# Altium PCB CapsuleBase.PcbDoc
Units mil, origin at the board's own origin, x right, y up, seen from the top; angles counter-clockwise.
Board outline 3937.01 x 3937.01 mil, 2 copper layers (Top, Bottom), stack 65.748 mil thick; 2 components, 0 nets, 4 pads, 0 vias.
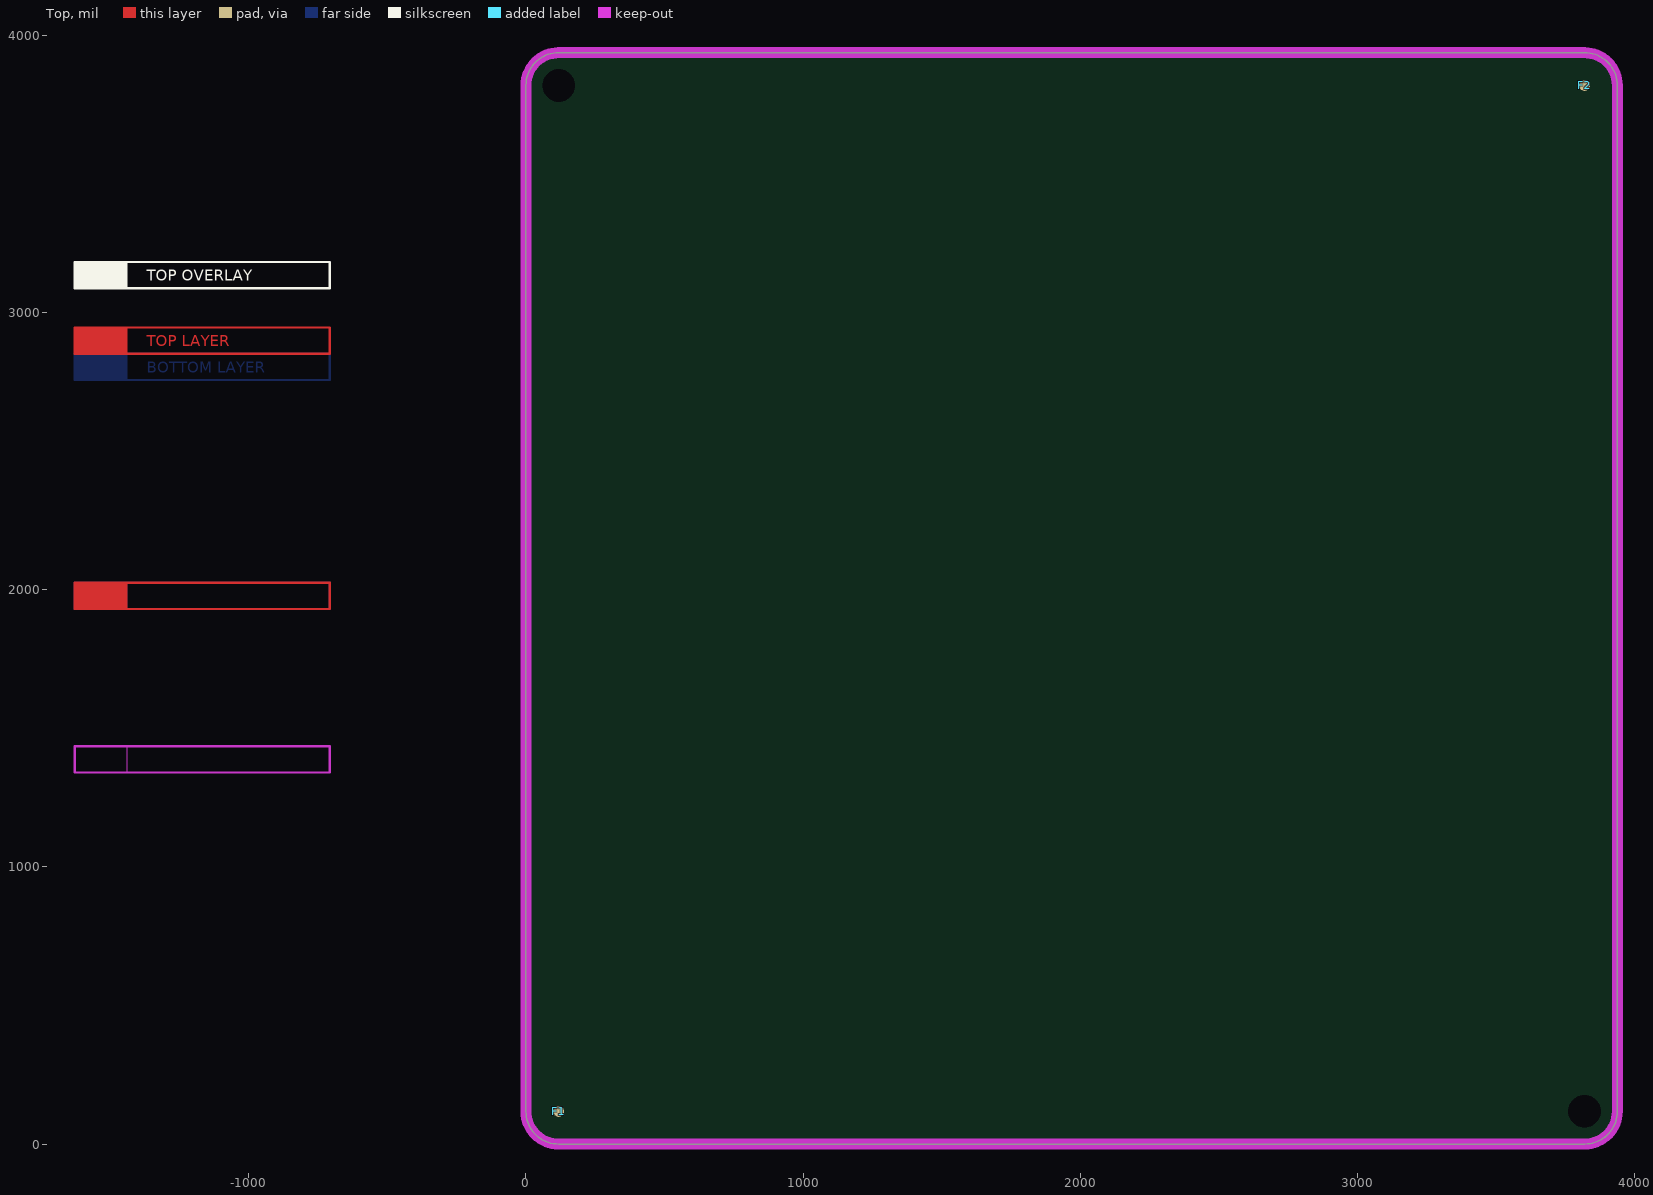
[diagram p0: Top view]
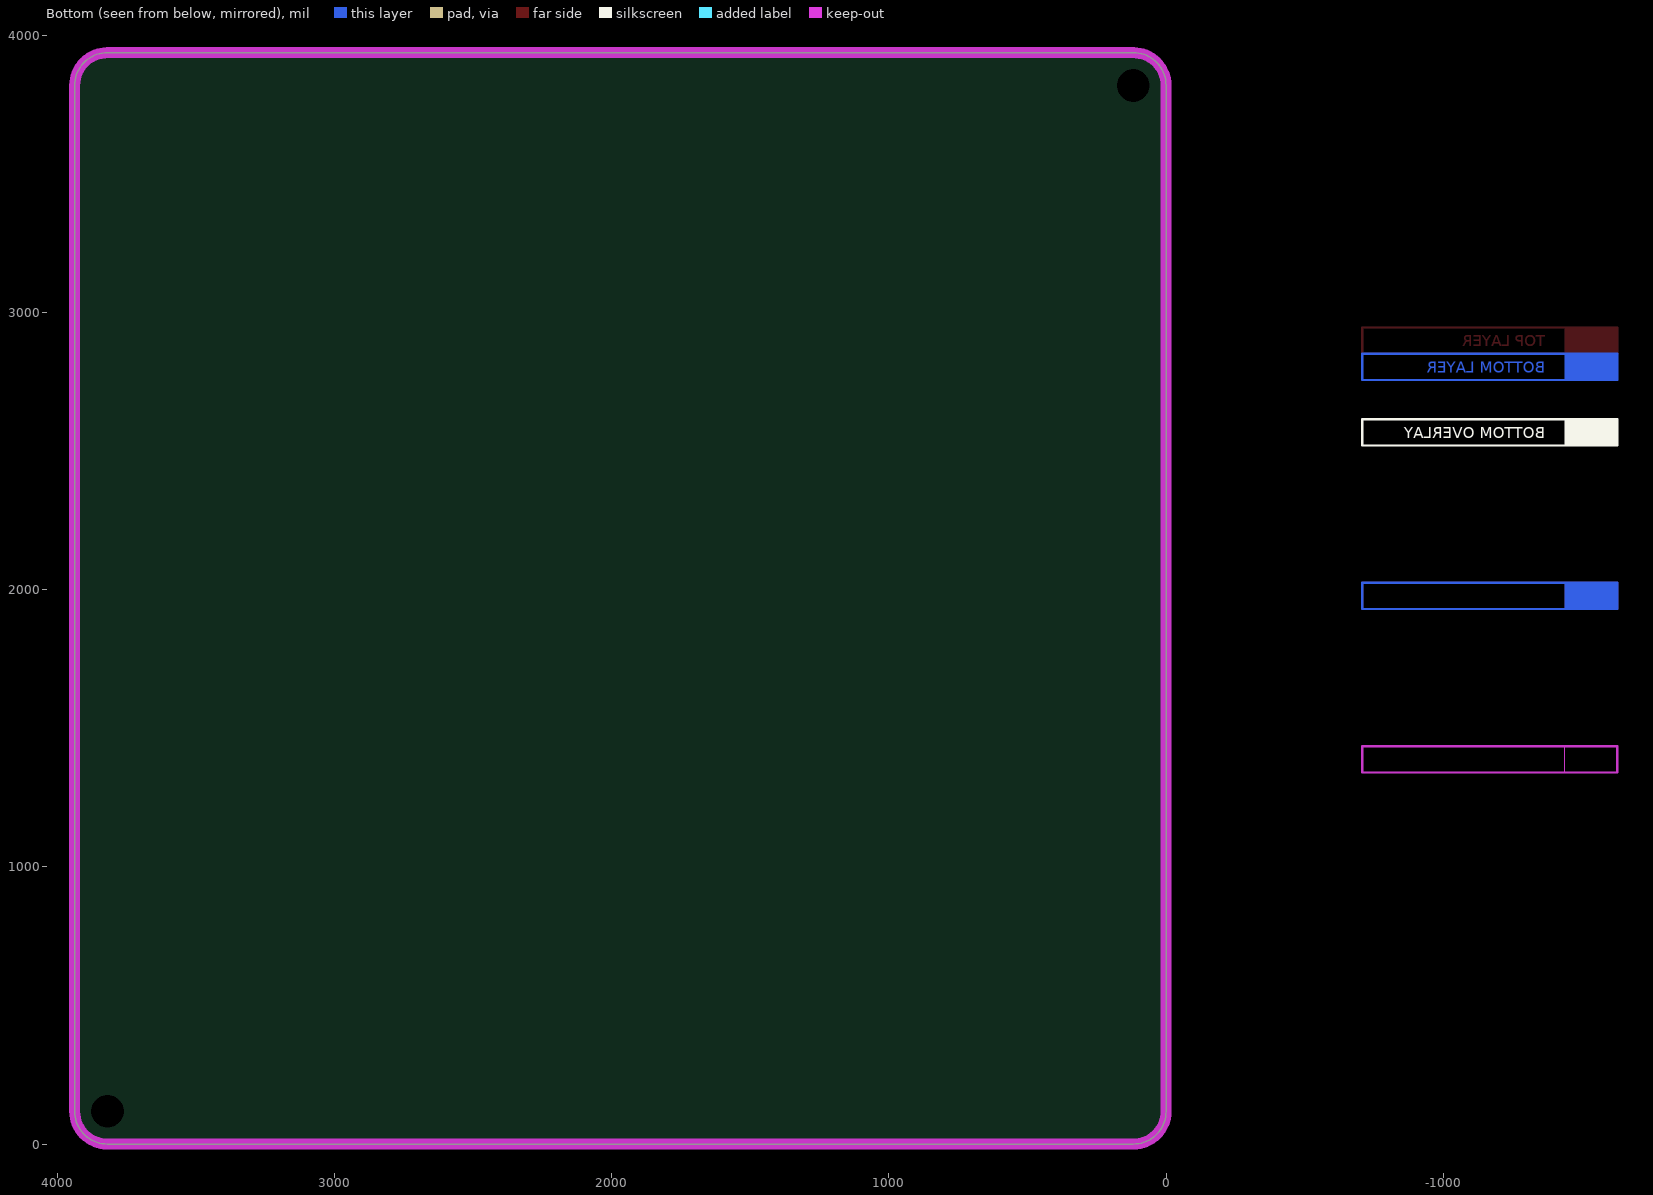
[diagram p1: Bottom view, seen from below]

## Layer stack, top to bottom
Top Solder: solder mask 0.4, Solder Resist, Dk 3.5
Top: signal copper 1.378
Dielectric1: core 62.9921, FR-4, Dk 4.58
Bottom: signal copper 1.378
Bottom Solder: solder mask 0.4, Solder Resist, Dk 3.5

## Board outline
0,118.11 0,3818.9 cw(c118.11,3818.9) 118.11,3937.01 3818.9,3937.01 cw(c3818.9,3818.9) 3937.01,3818.9 3937.01,118.11 cw(c3818.9,118.11) 3818.9,0 118.11,0 cw(c118.11,118.11)

## Design rules (kind name [scope] priority, off if disabled: settings)
AssemblyTestPointUsage [All] p1 off:
AssemblyTestpoint [All] p1 off: testpointundercomponent=TRUE minsize=40 maxsize=100 preferedsize=60 minholesize=0 maxholesize=40 preferedholesize=32 testpointgrid=1 usegrid=TRUE gridtolerance=0.01 allowsidetop=TRUE allowsidebottom=TRUE
Clearance ClearanceViaPad [IsVia vs IsPad] p1: gap=3.94
Clearance ClearanceGNDpolygons [InPolygonClass('GNDpolygons')] p2: gap=11.81
Clearance ClearanceTechnology [All] p3: gap=7.87
FabricationTestPointUsage [All] p1 off: valid=0 allowmultiple=FALSE
FabricationTestpoint [All] p1 off: side=3 testpointundercomponent=TRUE minsize=40 maxsize=100 preferedsize=60 minholesize=0 maxholesize=40 preferedholesize=32 testpointgrid=1 allowsidetop=TRUE allowsidebottom=TRUE usegrid=TRUE gridtolerance=0.01
HoleSize [All] p1: absolutevalues=TRUE maxlimit=248.03 minlimit=11.81 maxpercent=80.000 minpercent=20.000
HoleToHoleClearance [All] p1: gap=11.81 allowstackedmicrovias=TRUE
MinimumAnnularRing [All] p1: minimumring=7.87
MinimumSolderMaskSliver [All] p1: minsoldermaskwidth=3.94
PlaneClearance [All] p1: clearance=9.84
PolygonConnect PolygonConnectVia [IsVia] p1: connectstyle=Direct reliefconductorwidth=15.75 reliefentries=4 polygonreliefangle="90 Angle" airgapwidth=10
PolygonConnect PolygonConnectBigPads [(ObjectKind = 'Pad') And ((AsMM(PadXSize_AllLayers) > 2) Or (AsMM(PadYSize_AllLayers) > 2))] p2: connectstyle=Direct reliefconductorwidth=15.75 reliefentries=4 polygonreliefangle="90 Angle" airgapwidth=10
PolygonConnect PolygonConnectGeneral [All] p3: connectstyle=Relief reliefconductorwidth=11.81 reliefentries=4 polygonreliefangle="90 Angle" airgapwidth=7.87
RoutingVias [All] p1: holewidth=23.62 width=47.24 viastyle="Through Hole" minholewidth=11.81 minwidth=27.56 maxholewidth=35.43 maxwidth=55.12
SilkToSilkClearance [All] p1: silktosilkclearance=5.91
SilkToSolderMaskClearance SilkscreenOverComponentPads [IsPad] p1: minsilkscreentomaskgap=3.94 clearancetoexposedcopper=FALSE
SolderMaskExpansion [All] p1: expansion=3.94
Width WidthTechnology [All] p1: maxlimit=118.11 minlimit=6.3 preferedwidth=23.62
20 further rules are at their usual default settings.

## Classes and differential pairs
channel class "Column driver": "U_Column driver 1" "U_Column driver 2" "U_Column driver 3" "U_Column driver 4"
channel class "Row driver": "U_Row driver 1" "U_Row driver 2" "U_Row driver 3" "U_Row driver 4" "U_Row driver 5" "U_Row driver 6" "U_Row driver 7" "U_Row driver 8"

## Components (designator, comment, footprint, x,y, rotation, side; value= is the part's Value field where it differs from the comment)
F1 "Fiducial" FIDUCIAL 118.11,118.11 r90 top locked
F2 "Fiducial" FIDUCIAL 3818.9,3818.9 r90 top locked

## Footprints (in the part's own frame and the unit in brackets; to place one, negate y for a bottom-side part, rotate by r counter-clockwise, add the part's x,y. Pads: shape width x height; smd on the part's side, far side on the other; paste and mask are expansions set on the pad)
FIDUCIAL [mm] "Fiducial"
  round 1 smd paste-1 mask+0.5: ""(0,0)
  body extent -0.49,-0.5 0.5,0.5, height 0.5

## Free pads (board coordinates)
  round 39.37 hole 118.11: 0(118.11,3818.9) 0(3818.9,118.11)

## Nets (pads, with @x,y where several pads share a name; then routed paths per layer and width w, separated by ;. In a path a pad name is that pad's centre, name@x,y a point inside that pad or via, vN(x,y) a via of type N, cw(c..) or ccw(c..) an arc to the next point about the centre after c; other vN are vias at no path point)
pads on no net: F1. F2.
copper on no net: | length 4060
  Top w7.87: -1627.66,2850.95 -1627.66,2945.95 -707.66,2945.95 -707.66,2850.95 -1627.66,2850.95
  Bottom w7.87: -1627.66,2755.95 -1627.66,2850.95 -707.66,2850.95 -707.66,2755.95 -1627.66,2755.95

## Keep-outs
Keep-Out Layer:
  rectangle: -1627.66,1339.95 -1437.66,1434.95
  lines w7.87: -1627.66,1339.95 -1627.66,1434.95 -707.66,1434.95 -707.66,1339.95 -1627.66,1339.95
  lines w39.37: 118.11,3937.01 ccw(c118.11,3818.9) 0,3818.9 0,118.11 ccw(c118.11,118.11) 118.11,0 3818.9,0 ccw(c3818.9,118.11) 3937.01,118.11 ; 118.11,3937.01 118.11,3937.01 ; 118.11,3937.01 3818.9,3937.01 ; 3818.9,3937.01 cw(c3818.9,3818.9) 3937.01,3818.9 ; 3818.9,3937.01 3818.9,3937.01 ; 3937.01,118.11 3937.01,3818.9 ; 3937.01,118.11 3937.01,118.11 ; 3937.01,3818.9 3937.01,3818.9
  text "ROUTING KEEPOUT LAYER" at -1367.66,1366.95 h35

## Other copper
Top:
  rectangle: -1627.66,2850.95 -1437.66,2945.95
  text "TOP LAYER" at -1367.66,2877.95 h40
Bottom:
  rectangle: -1627.66,2755.95 -1437.66,2850.95
  text "BOTTOM LAYER" at -1367.66,2782.95 h40
Multi-Layer:
  rectangle: -1627.66,1929.95 -1437.66,2024.95
  lines w7.87: -1627.66,1929.95 -1627.66,2024.95 -707.66,2024.95 -707.66,1929.95 -1627.66,1929.95
  text "MULTILAYER" at -1367.66,1956.95 h40

## Silkscreen, mask and mechanical layers (free items; w line width, h text height)
Top Overlay:
  rectangle: -1627.66,3086.95 -1437.66,3181.95
  lines w7.87: -1627.66,3086.95 -707.66,3086.95 -707.66,3181.95 -1627.66,3181.95 -1627.66,3086.95
  text "TOP OVERLAY" at -1367.66,3113.95 h40
Bottom Overlay:
  rectangle: -1627.66,2519.95 -1437.66,2614.95
  lines w7.87: -1627.66,2519.95 -707.66,2519.95 -707.66,2614.95 -1627.66,2614.95 -1627.66,2519.95
  text "BOTTOM OVERLAY" at -1367.66,2546.95 h40
Top Paste:
  rectangle: -1627.66,3204.95 -1437.66,3299.95
  lines w7.87: -1627.66,3204.95 -1627.66,3299.95 -707.66,3299.95 -707.66,3204.95 -1627.66,3204.95
  text "TOP PASTE" at -1367.66,3231.95 h40
Bottom Paste:
  rectangle: -1627.66,2401.95 -1437.66,2496.95
  lines w7.87: -1627.66,2401.95 -1627.66,2496.95 -707.66,2496.95 -707.66,2401.95 -1627.66,2401.95
  text "BOTTOM PASTE" at -1367.66,2428.95 h40
Top Solder:
  rectangle: -1627.66,2968.95 -1437.66,3063.95
  lines w7.87: -1627.66,2968.95 -707.66,2968.95 -707.66,3063.95 -1627.66,3063.95 -1627.66,2968.95
  text "TOP SOLDER MASK" at -1367.66,2995.95 h40
Bottom Solder:
  rectangle: -1627.66,2637.95 -1437.66,2732.95
  lines w7.87: -1627.66,2637.95 -1627.66,2732.95 -707.66,2732.95 -707.66,2637.95 -1627.66,2637.95
  text "BOTTOM SOLDER MASK" at -1367.66,2664.95 h40
Drill Guide:
  rectangle: -1627.66,2283.95 -1437.66,2378.95
  lines w7.87: -1627.66,2283.95 -707.66,2283.95 -707.66,2378.95 -1627.66,2378.95 -1627.66,2283.95
  text "DRILL GUIDE (SLOTS)" at -1367.66,2310.95 h40
Outline:
  rectangle: -1627.66,2047.95 -1437.66,2142.95
  lines w3.94: 0,118.11 ccw(c118.11,118.11) 118.11,0 3818.9,0 ccw(c3818.9,118.11) 3937.01,118.11 3937.01,3818.9 ccw(c3818.9,3818.9) 3818.9,3937.01 118.11,3937.01 ccw(c118.11,3818.9) 0,3818.9 0,118.11
  lines w7.87: -1627.66,2047.95 -707.66,2047.95 -707.66,2142.95 -1627.66,2142.95 -1627.66,2047.95
  lines w9.84: 4717.48,-1105.32 9786.46,-1105.32 ; 4717.48,-934.06 9786.46,-934.06 ; 4657.48,-1889.76 ccw(c4712.6,-1889.76) 4712.6,-1944.88 9791.34,-1944.88 ccw(c9791.34,-1889.76) 9846.46,-1889.76 9846.46,-748.03 ccw(c9791.34,-748.03) 9791.34,-692.91 4712.6,-692.91 ccw(c4712.6,-748.03) 4657.48,-748.03 4657.48,-1889.76
  lines w10: -1727.66,4633.94 2716.54,4633.94 2716.54,4409.45 ; -1727.66,4835.71 2716.54,4835.71 2716.54,4611.66 ; -1537.66,3389.95 -767.66,3389.95 ; 1299.21,4409.45 1299.21,4633.94 ; 2716.54,4835.63 3739.17,4835.63 ; -1727.66,1252.95 -1727.66,3609.95 -597.66,3609.95 -597.66,1252.95 -1727.66,1252.95 ; -1727.66,4409.45 3740.16,4409.45 3740.16,5120.08 -1727.66,5120.08 -1727.66,4409.45
  text ".GlobalProjectName" at -1264.76,4920.28 h118.11
  text "Project:" at -1669.55,4914.02 h47.24
  text ".GlobalProjectTeam" at -1364.17,4696.85 h80
  text ".GlobalProjectLink" at 1383.86,4696.85 h80
  text "Team:" at -1669.55,4693.9 h47.24
  text "More info:" at 998.03,4693.9 h47.24
  text ".GlobalProjectRevision" at 2952.76,4488.19 h275.59
  text ".Pcb_File_Name_No_Path" at -1102.36,4485.59 h80
  text "PCB file name:" at -1669.55,4484.53 h47.24
  text ".GlobalRevisionDate" at 1894.43,4468.77 h80
  text "Rev:" at 2795.28,4468.77 h47.24
  text "Revision date:" at 1375.73,4464.85 h47.24
  text "LAYER USAGE" at -1537.66,3417.95 h80
  text "Fusion service size limits" at 5157.48,3023.62 h196.85
  text "5cm X 5cm" at 5275.59,2826.85 h196.85
  text "5cm X 10cm" at 5275.59,2678.11 h196.85
  text "5cm X 15cm" at 5275.59,2529.37 h196.85
  text "5cm X 20cm" at 5275.59,2380.63 h196.85
  text "10cm X 10cm" at 5275.59,2231.89 h196.85
  text "10cm X 15cm" at 5275.59,2083.15 h196.85
  text "BOARD OUTLINE" at -1367.66,2074.95 h40
  text "10cm X 20cm" at 5275.59,1934.41 h196.85
  text "15cm X 15cm" at 5275.59,1785.67 h196.85
  text "15cm X 20cm" at 5275.59,1636.93 h196.85
  text "20cm X 20cm" at 5275.59,1488.19 h196.85
  text "Layer Stack Up Detail for: 2 Layer Seed Fusion template" at 4717.48,-873.13 h80.71
  text "Layer" at 4717.48,-998.03 h39.37
  text "Gerber" at 5802.16,-998.03 h39.37
  text "Copper" at 6351.06,-998.03 h39.37
  text "Dielectric" at 6964.24,-998.03 h39.37
  text "Dielectric" at 7604.98,-998.03 h39.37
  text "Dielectric" at 8414.16,-998.03 h39.37
  text "Dielectric" at 9054.89,-998.03 h39.37
  text "Name" at 4717.48,-1076.77 h39.37
  text "Document" at 5802.16,-1076.77 h39.37
  text "Thickness" at 6351.06,-1076.77 h39.37
  text "Height" at 6964.24,-1076.77 h39.37
  text "Material" at 7604.98,-1076.77 h39.37
  text "Constant" at 8414.16,-1076.77 h39.37
  text "Type" at 9054.89,-1076.77 h39.37
  text "Top Solder Mask" at 4717.48,-1229.23 h55.12
  text "(.GTS)" at 5802.16,-1229.23 h55.12
  text "0.0102mm" at 6964.24,-1229.23 h55.12
  text "Solder Resist" at 7604.98,-1229.23 h55.12
  text "3.50" at 8414.16,-1229.23 h55.12
  text "Top" at 4717.48,-1387.89 h55.12
  text "(.GTL)" at 5802.16,-1387.89 h55.12
  text "0.035mm" at 6351.06,-1387.89 h55.12
  text "1.6mm" at 6964.24,-1467.22 h55.12
  text "FR-4" at 7604.98,-1467.22 h55.12
  text "4.58" at 8414.16,-1467.22 h55.12
  text "Core" at 9054.89,-1467.22 h55.12
  text "Bottom" at 4717.48,-1546.55 h55.12
  text "(.GBL)" at 5802.16,-1546.55 h55.12
  text "0.035mm" at 6351.06,-1546.55 h55.12
  text "Bottom Solder Mask" at 4717.48,-1705.22 h55.12
  text "(.GBS)" at 5802.16,-1705.22 h55.12
  text "0.0102mm" at 6964.24,-1705.22 h55.12
  text "Solder Resist" at 7604.98,-1705.22 h55.12
  text "3.50" at 8414.16,-1705.22 h55.12
Dimensions:
  rectangle: -1627.66,1457.95 -1437.66,1552.95
  lines w7.87: -1619.93,-426.53 -907.93,-426.53 ; -1616.93,-109.53 -904.93,-109.53 ; -1616.93,644.47 -904.93,644.47 ; -1615.93,341.47 -903.93,341.47 ; -1610.93,779.47 -898.93,779.47 ; -1627.66,1457.95 -707.66,1457.95 -707.66,1552.95 -1627.66,1552.95 -1627.66,1457.95
  lines w10: -1656.05,-700.79 -1656.05,928.47 -705.05,928.47 -705.05,-700.79 -1656.05,-700.79
  text "DIMENSIONS" at -1367.66,1484.95 h40
  text "BUILD STATISTICS" at -1606.93,810.47 h60
  text "GENERAL" at -1614.93,664.47 h40
  text ".Net_Count" at -1233.93,581.47 h40
  text "NETS" at -1611.93,579.47 h35
  text ".Component_Count" at -1233.93,499.47 h40
  text "COMPONENTS" at -1610.93,498.47 h35
  text "PRIMITIVES" at -1613.93,361.47 h40
  text ".Fill_Count" at -1233.93,277.47 h40
  text "FILLS" at -1610.93,276.47 h35
  text ".Track_Count" at -1233.93,196.47 h40
  text "TRACKS" at -1610.93,194.47 h35
  text ".String_Count" at -1233.93,114.47 h40
  text "STRINGS" at -1610.93,112.47 h35
  text ".Arc_Count" at -1233.93,31.47 h40
  text "ARC'S" at -1610.93,29.47 h35
  text "LANDS" at -1614.93,-89.53 h40
  text ".Pad_Count" at -1233.93,-173.53 h40
  text ".Pad_Count" at -1233.93,-173.53 h40
  text "PADS" at -1610.93,-175.53 h35
  text ".Via_Count" at -1233.93,-255.53 h40
  text "VIA'S" at -1609.93,-256.53 h35
  text "PRINT SCALE" at -1617.93,-406.53 h40
  text ".Print_Scale" at -1235.93,-491.53 h40
  text "SCALE" at -1612.93,-492.53 h35
  text ".Print_Date" at -1235.93,-572.53 h40
  text "PRINT DATE" at -1611.93,-573.53 h35
  text ".Print_Time" at -1234.93,-653.53 h40
  text "PRINT TIME" at -1610.93,-654.53 h35
Assembly Top:
  rectangle: -1627.66,1811.95 -1437.66,1906.95
  lines w7.87: -1627.66,1811.95 -1627.66,1906.95 -707.66,1906.95 -707.66,1811.95 -1627.66,1811.95
  text "TOP ASSEMBLY" at -1367.66,1838.95 h40
Assembly Bot:
  rectangle: -1627.66,1693.95 -1437.66,1788.95
  lines w7.87: -1627.66,1693.95 -1627.66,1788.95 -707.66,1788.95 -707.66,1693.95 -1627.66,1693.95
  text "BOTTOM ASSEMBLY" at -1367.66,1720.95 h40
Drill Drawing:
  rectangle: -1627.66,2165.95 -1437.66,2260.95
  lines w1: -5.06,-1719.5 19.94,-1707 44.94,-1719.5 32.44,-1694.5 44.94,-1669.5 19.94,-1682 -5.06,-1669.5 7.44,-1694.5 -5.06,-1719.5
  lines w7.87: -1627.66,2165.95 -1627.66,2260.95 -707.66,2260.95 -707.66,2165.95 -1627.66,2165.95
  lines w15: -73.19,-1764.5 3805.78,-1764.5 ; -73.19,-1614.5 3805.78,-1614.5 ; 477.69,-1914.5 477.69,-1464.5 ; 1175.5,-1914.5 1175.5,-1464.5 ; 2521.1,-1914.5 2521.1,-1464.5 ; 3026.98,-1914.5 3026.98,-1464.5 ; -73.19,-1914.5 3805.78,-1914.5 3805.78,-1464.5 -73.19,-1464.5 -73.19,-1914.5
  text "DRILL DRAWING" at -1367.66,2192.95 h40
  text "Symbol" at 16.81,-1569.5 h72
  text "Hit Count" at 522.69,-1569.5 h72
  text "Finished Hole Size" at 1220.5,-1569.5 h72
  text "Plated" at 2566.1,-1569.5 h72
  text "Hole Type" at 3071.98,-1569.5 h72
  text "2" at 522.69,-1719.5 h60
  text "3.0mm" at 1220.5,-1719.5 h60
  text "PTH" at 2566.1,-1719.5 h60
  text "Round" at 3071.98,-1719.5 h60
  text "2 Total" at 522.69,-1869.5 h60

## Dimensions
3818.9,0 to 3818.9,3937.01 on Dimensions
0,118.11 to 3937.01,118.11 on Dimensions